# Altium PCB onion_dock.PcbDoc
Units mil, origin at the board's own origin, x right, y up, seen from the top; angles counter-clockwise.
Board outline 1720 x 1710 mil, 2 copper layers (Top Layer, Bottom Layer); 14 components, 37 nets, 125 pads, 7 vias.
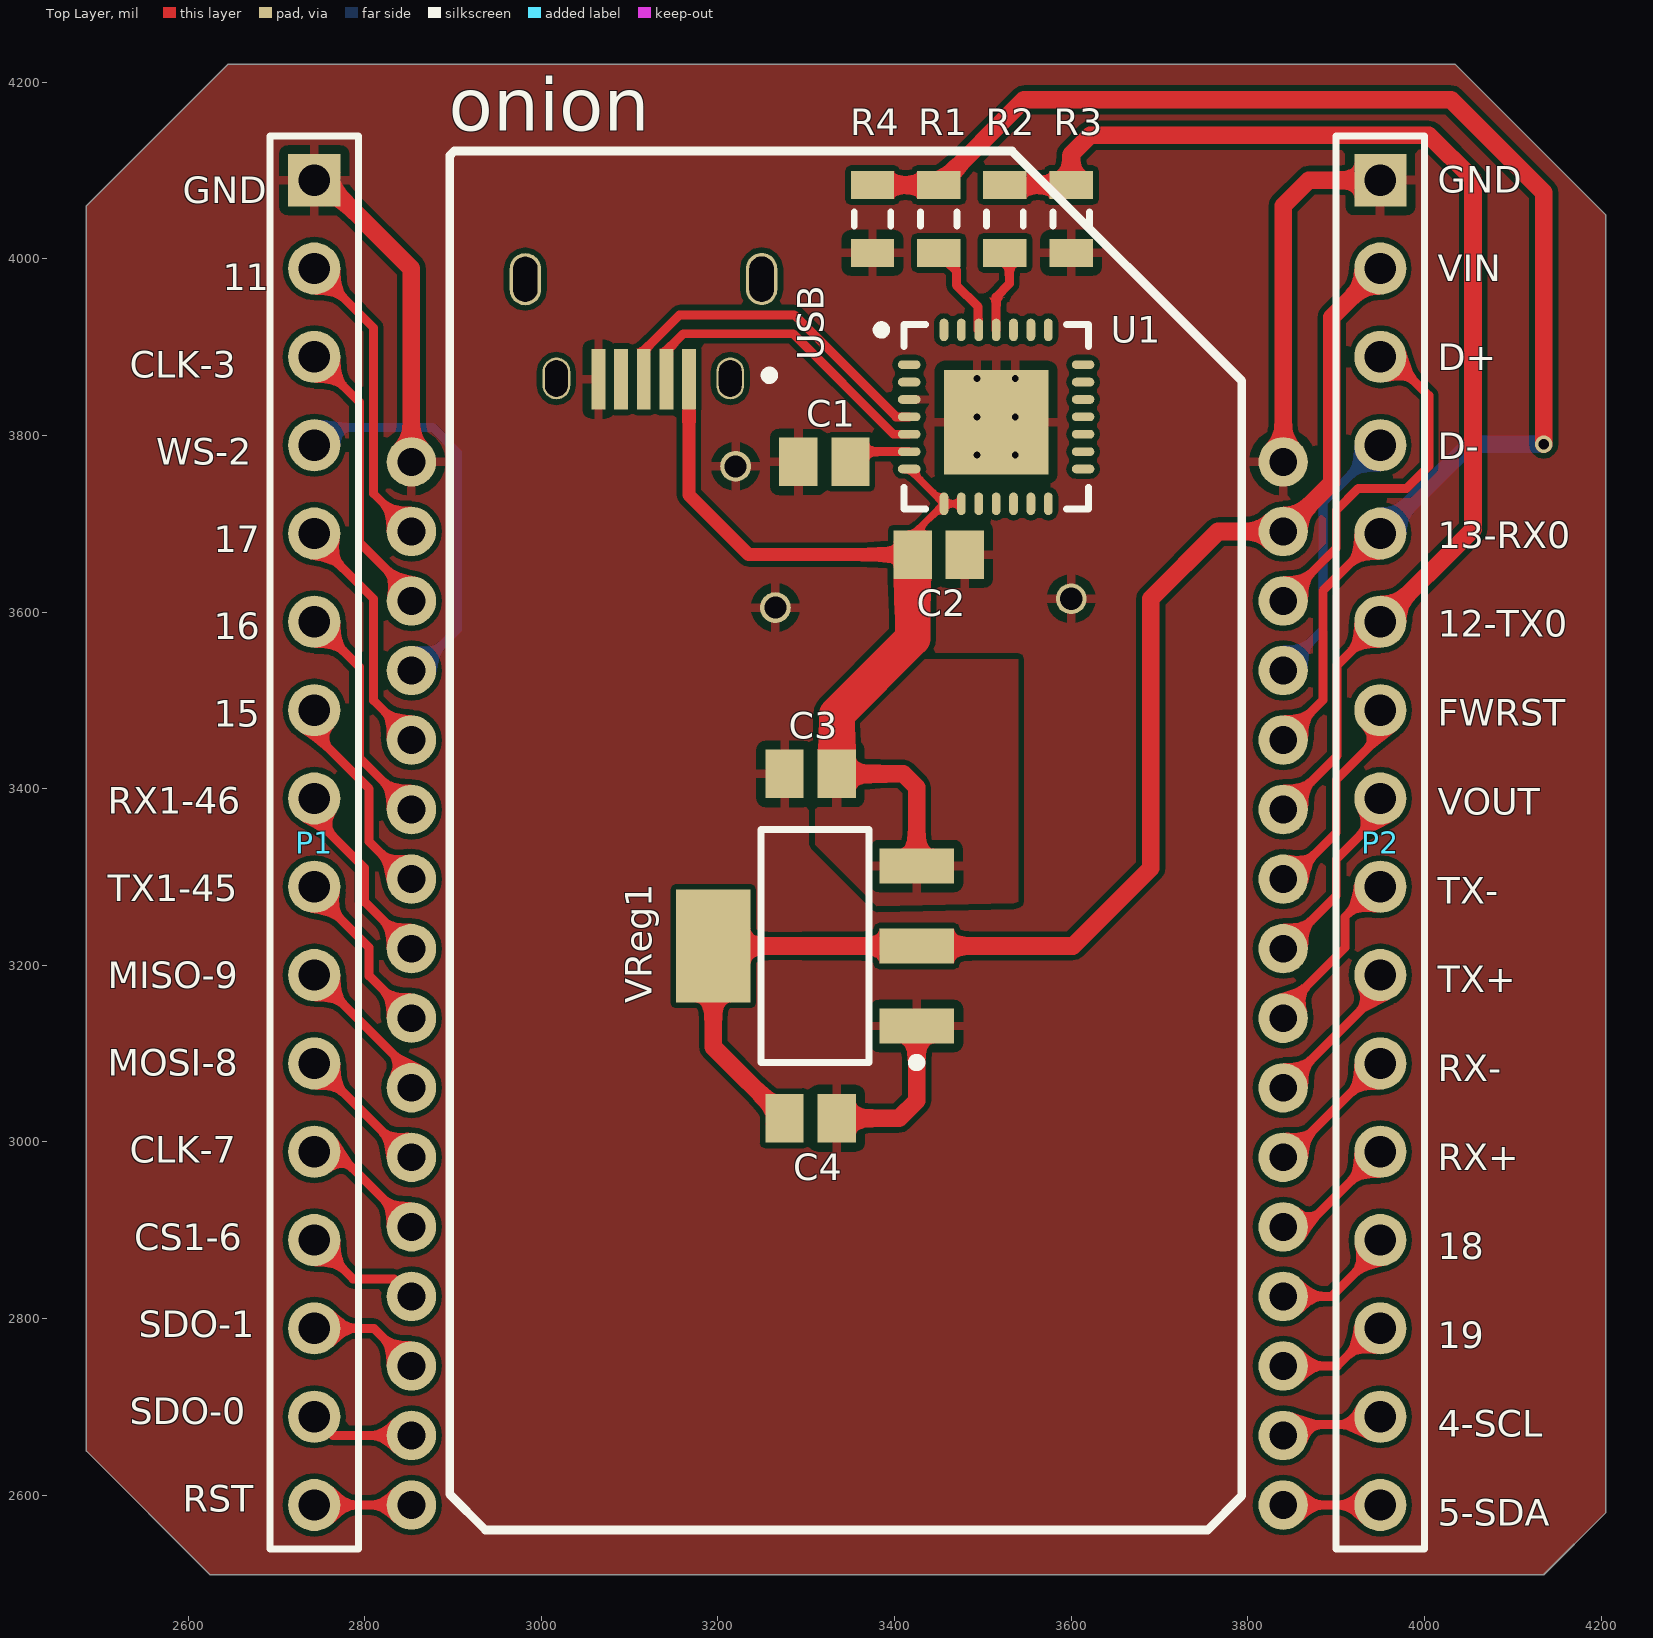
[diagram p0: Top Layer view]
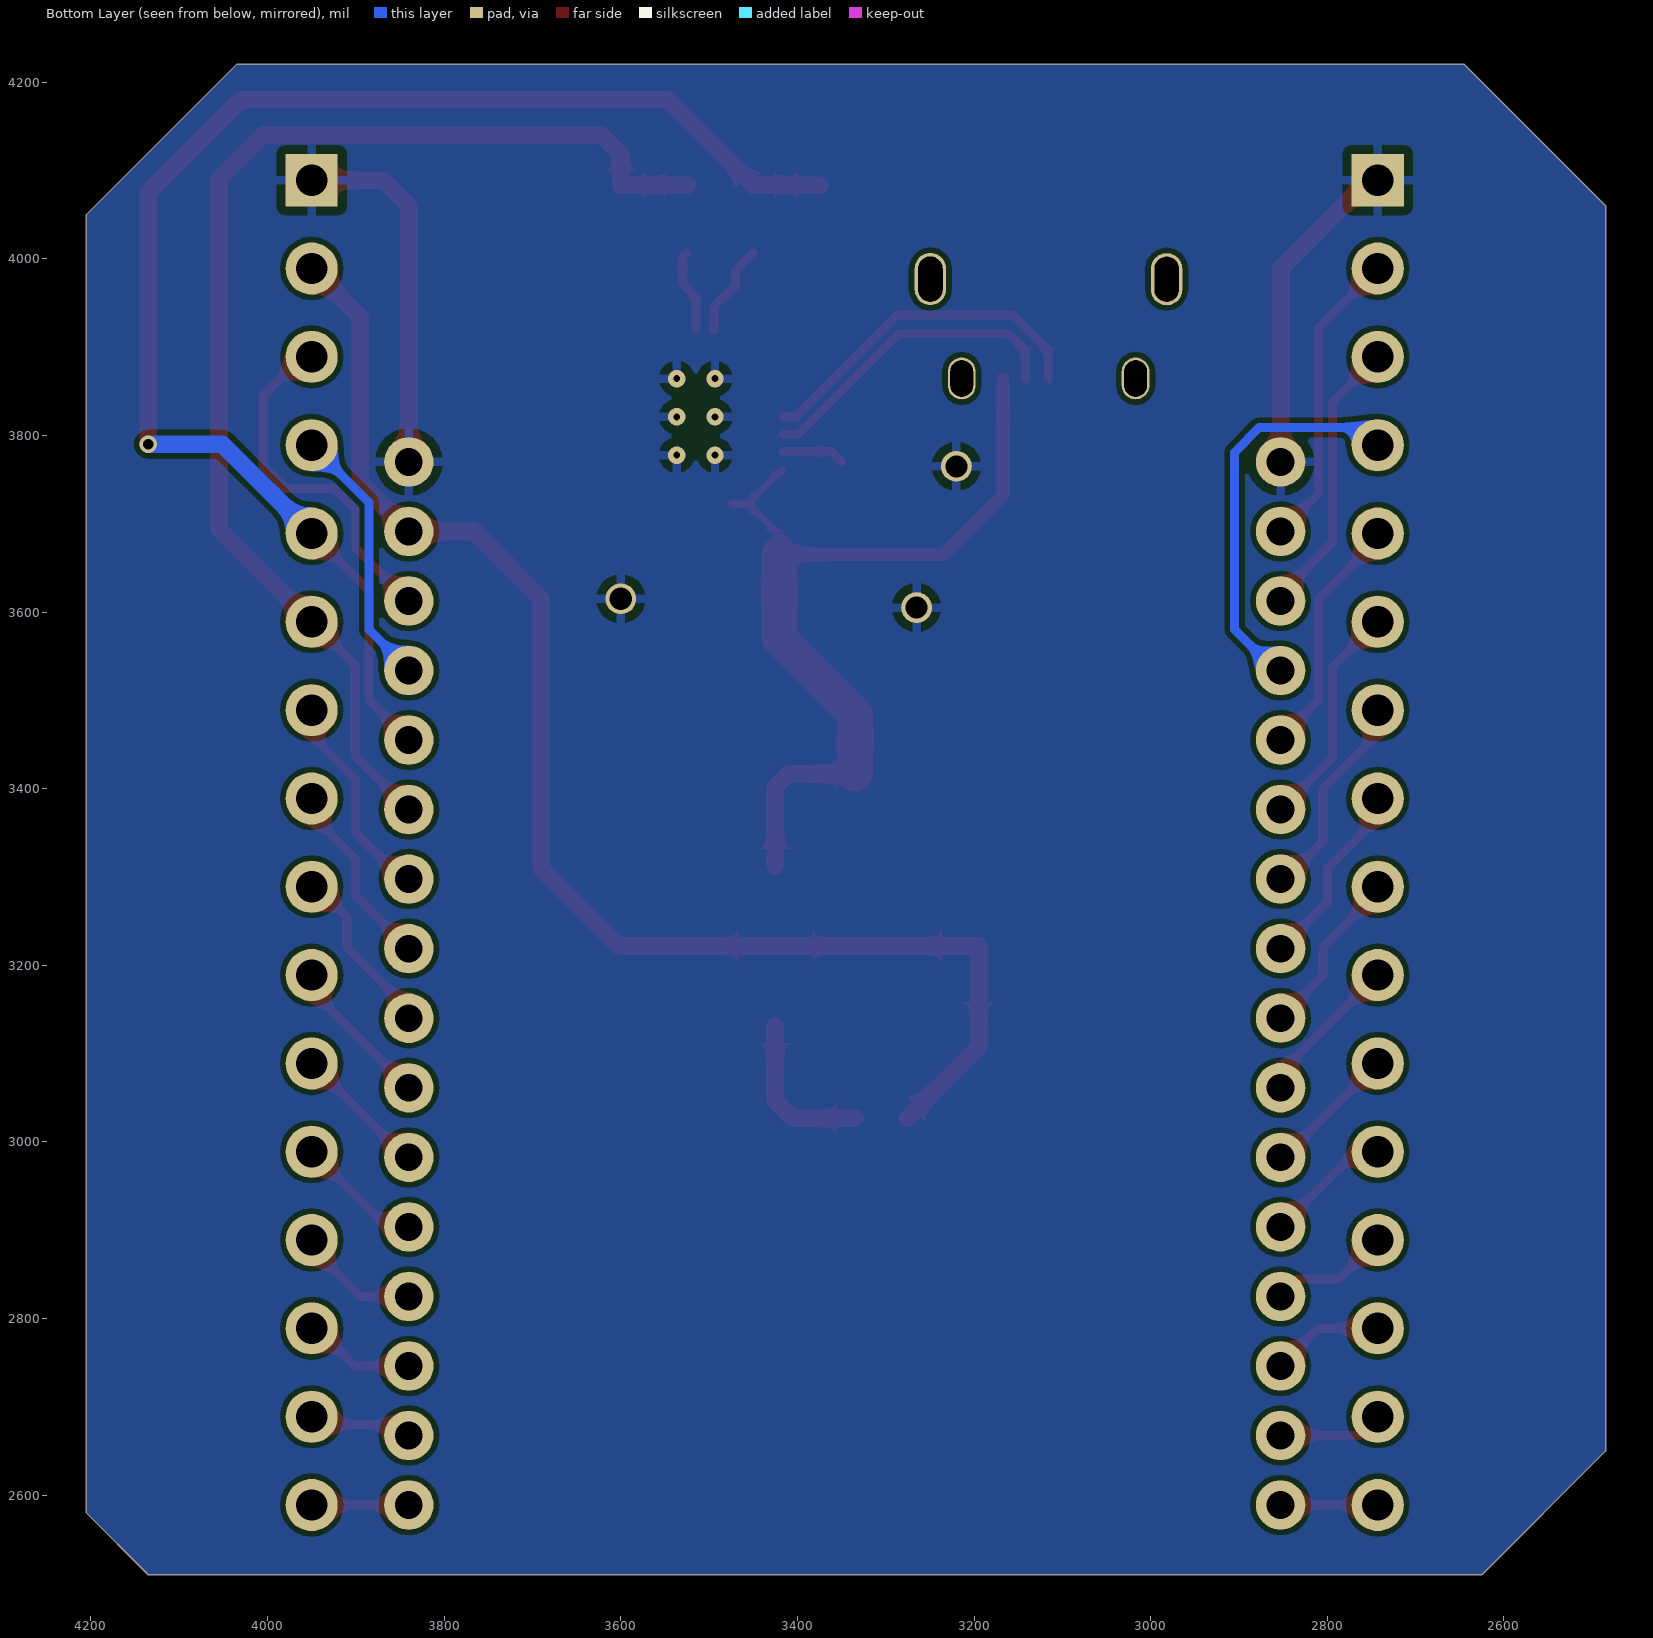
[diagram p1: Bottom Layer view, seen from below]
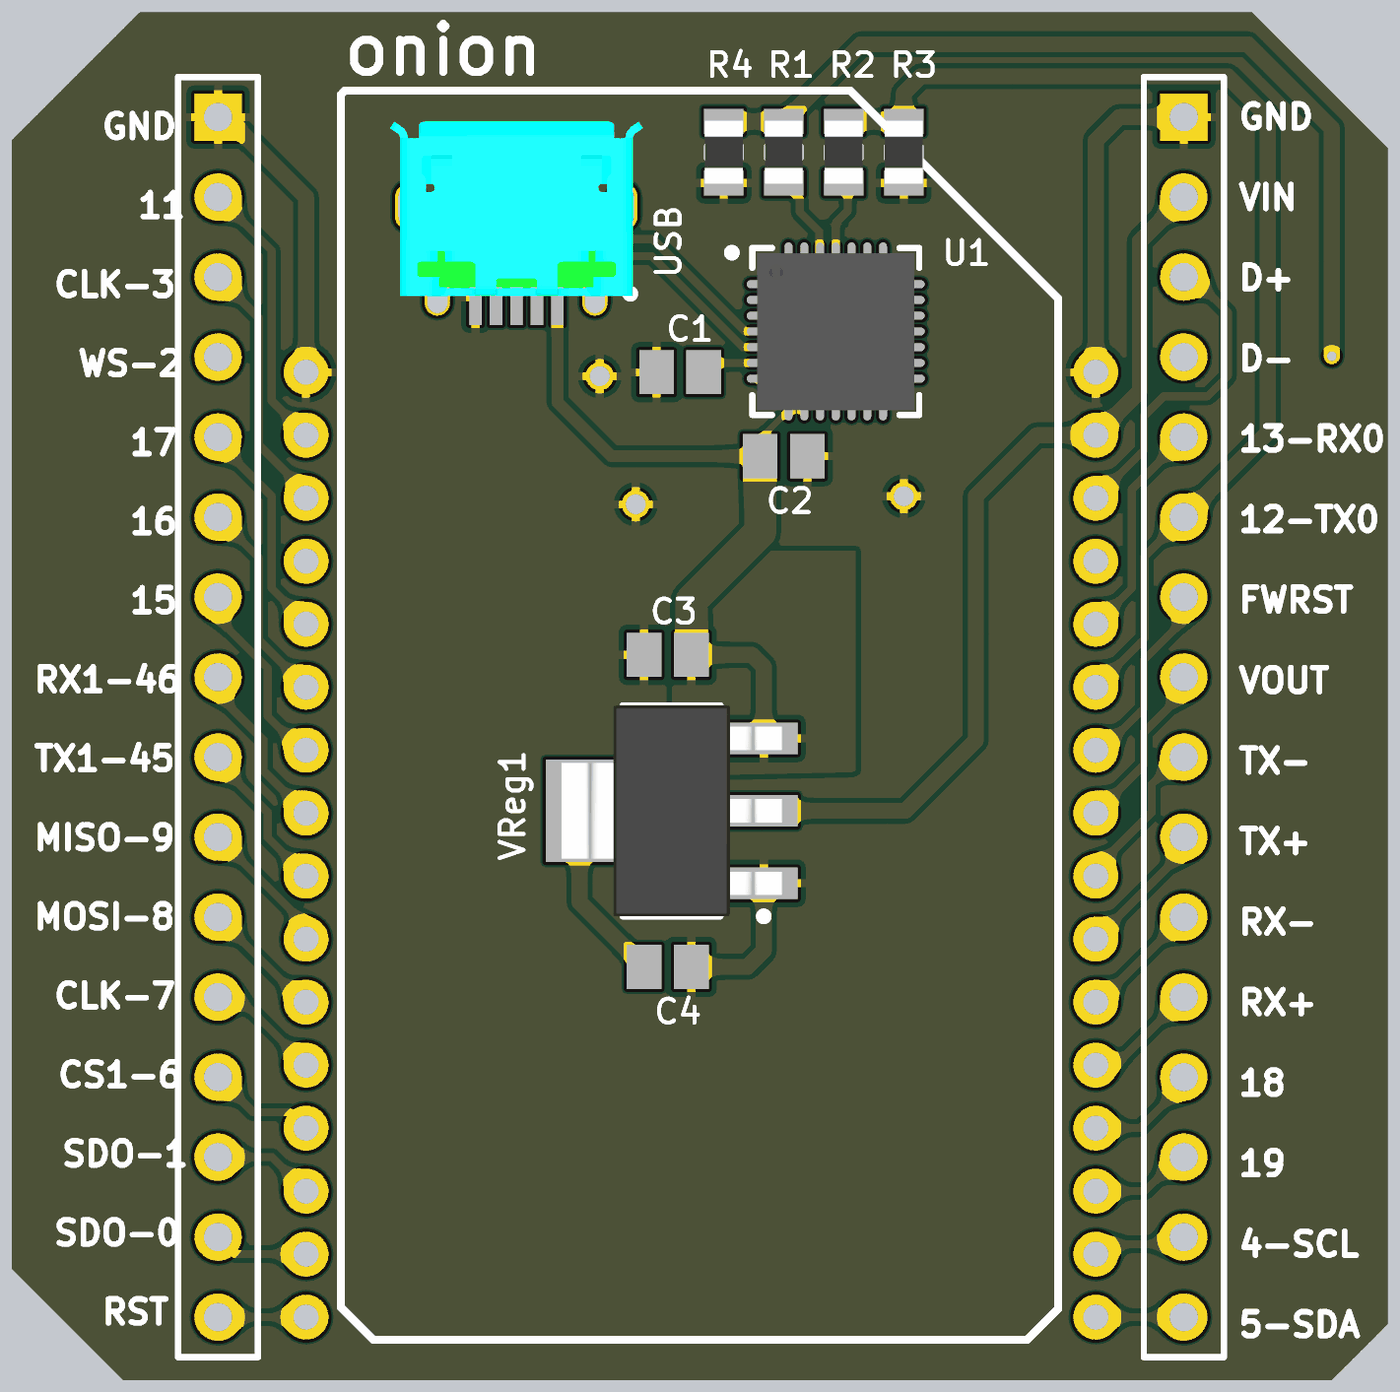
[diagram p2: 3D render of the assembled board from above, using the file's embedded part models]

## Layer stack, top to bottom
Top Solder: solder mask 0.4, Solder Resist, Dk 3.5
Top Layer: signal copper 1.4
Dielectric 1: dielectric 12.6, FR-4, Dk 4.8
Bottom Layer: signal copper 1.4
Bottom Solder: solder mask 0.4, Solder Resist, Dk 3.5

## Board outline
2625,2510 2485,2650 2485,4060 2645,4220 4035,4220 4205,4050 4205,2580 4135,2510

## Design rules (kind name [scope] priority, off if disabled: settings)
Clearance [All] p1: gap=6 ignorepadtopadclearanceinfootprint=FALSE
DiffPairsRouting [All] p1: maxlimit=10 minlimit=10 mostfreqgap=10 toplayer_minwidth=15 toplayer_maxwidth=15 toplayer_prefwidth=15 bottomlayer_minwidth=15 bottomlayer_maxwidth=15 bottomlayer_prefwidth=15 maxuncoupledlength=500
PolygonConnect [All] p1: connectstyle=Relief reliefconductorwidth=10 reliefentries=4 polygonreliefangle="90 Angle" airgapwidth=10
RoutingVias [All] p1: holewidth=12 width=20 viastyle="Through Hole" minholewidth=12 minwidth=20 maxholewidth=28 maxwidth=30
SolderMaskExpansion [All] p1: expansion=4
Width [All] p1: maxlimit=40 minlimit=8 preferedwidth=10 minimp=50.000000 maximp=50.000000 favimp=50.000000
29 further rules are at their usual default settings.

## Classes and differential pairs
differential pair UD: +UD_P -UD_N

## Components (designator, comment, footprint, x,y, rotation, side; value= is the part's Value field where it differs from the comment)
C1 "C0805_10uF_25V" C0805 3320.47,3770 r180 top value=10uF
C2 "C0805_10uF_25V" C0805 3450,3665 r0 top value=10uF
C3 "C0805_1uF_25V" C0805 3305,3416.78 r0 top value=1uF
C4 "C0805_1uF_25V" C0805 3305,3026.78 r180 top value=1uF
onion "ONION2" ONION2 3358.51,3112.5 r0 top locked
P1 "Header 16" HDR1X16 2742.94,4088.92 r270 top
P2 "Header 16" HDR1X16 3950,4088.92 r270 top
R1 "R0805_1K_100mW" R0805 3450,4045 r90 top value=1K
R2 "R0805_1K_100mW" R0805 3525,4045 r90 top value=1K
R3 "R0805_1K_100mW" R0805 3600,4045 r90 top value=3K
R4 "R0805_1K_100mW" R0805 3375,4045 r90 top value=3K
U1 "CP2102" QFN50P500X500X100_HS-29N 3515,3821 r0 top
USB "USB" MicroUSB 3075,3900 r270 top
VReg1 "3v3 Voltage Regulator" SOT230P700X180-4N 3309.84,3221.78 r180 top

## Footprints (in the part's own frame and the unit in brackets; to place one, negate y for a bottom-side part, rotate by r counter-clockwise, add the part's x,y. Pads: shape width x height; smd on the part's side, far side on the other; paste and mask are expansions set on the pad)
C0805 [mm] "Chip Capacitor, Body 2.0x1.3mm, IPC High Density"
  rect 1.1x1.4 smd: 1(-0.75,0) 2(0.75,0)
  body extent -1.1,-0.72 1.1,0.72, height 1.4
HDR1X16 [mm] "Connector; Header; 16 Position"
  rect 1.5x1.5 hole 0.9: 1(0,0)
  round 1.5 hole 0.9: 2(2.54,0) 3(5.08,0) 4(7.62,0) 5(10.16,0) 6(12.7,0) 7(15.24,0) 8(17.78,0) 9(20.32,0) 10(22.86,0) 11(25.4,0) 12(27.94,0) 13(30.48,0) 14(33.02,0) 15(35.56,0) 16(38.1,0)
  silkscreen extent -1.27,-1.27 39.37,1.27
MicroUSB [mm] "Connector; USB Mini-B, Sinking Type, SM; 5 Position; Right Angle"
  rect 1.75x0.4 smd: 1(0.925,2.341) 2(0.925,1.691) 3(0.925,1.041) 4(0.925,0.391) 5(0.925,-0.259)
  oval 1.5x0.9 hole 0.7 slot 1.3 at 0 deg: ""(-1.955,4.432) ""(-1.952,-2.364)
  oval 1.2x0.8 hole 0.65 slot 1.05 at 0 deg: ""(0.903,3.529) ""(0.903,-1.471)
  silkscreen extent 0.69,4.53 0.94,4.78, body extent -4.65,-2.98 0.93,5.07, height 2.42
ONION2 [mil]
  round 56 hole 31.5: 1(-505.58,657.52) 2(-505.58,578.78) 3(-505.58,500.04) 4(-505.58,421.3) 5(-505.58,342.56) 6(-505.58,263.82) 7(-505.58,185.08) 8(-505.58,106.34) 9(-505.58,27.6) 10(-505.58,-51.14) 11(-505.58,-129.88) 12(-505.58,-208.62) 13(-505.58,-287.36) 14(-505.58,-366.1) 15(-505.58,-444.84) 16(-505.58,-523.58) 17(481.49,-523.6) 18(481.49,-444.86) 19(481.49,-366.12) 20(481.49,-287.38) 21(481.49,-208.64) 22(481.49,-129.9) 23(481.49,-51.16) 24(481.49,27.58) 25(481.49,106.32) 26(481.49,185.06) 27(481.49,263.8) 28(481.49,342.54) 29(481.49,421.28) 30(481.49,500.02) 31(481.49,578.76) 32(481.49,657.5)
  silkscreen extent -462,-552 435,1010
QFN50P500X500X100_HS-29N [mm] "QFN, 28-Leads, Body 5.00x5.00mm, Pitch 0.50mm, Thermal Pad 4.00x3.13mm, IPC Medium Density"
  oval 0.65x0.25 smd: 1(-2.5,1.5) 2(-2.5,1) 3(-2.5,0.5) 4(-2.5,0) 5(-2.5,-0.5) 6(-2.5,-1) 7(-2.5,-1.5) 15(2.5,-1.5) 16(2.5,-1) 17(2.5,-0.5) 18(2.5,0) 19(2.5,0.5) 20(2.5,1) 21(2.5,1.5)
  oval 0.25x0.65 smd: 8(-1.5,-2.5) 9(-1,-2.5) 10(-0.5,-2.5) 11(0,-2.5) 12(0.5,-2.5) 13(1,-2.5) 14(1.5,-2.5) 22(1.5,2.5) 23(1,2.5) 24(0.5,2.5) 25(0,2.5) 26(-0.5,2.5) 27(-1,2.5) 28(-1.5,2.5)
  rect 3x3 smd: 29(0,-0.152)
  silkscreen extent -3.42,-2.65 2.65,2.65, body extent -2.5,-2.51 2.5,2.49, height 1
R0805 [mm] "Chip Resistor, 2-Leads, Body 2.00x1.20mm, IPC Medium Density"
  rect 0.8x1.25 smd: 1(-0.975,0) 2(0.975,0)
  silkscreen extent -0.2,-0.53 0.2,0.53, body extent -1,-0.6 1,0.6, height 0.45
SOT230P700X180-4N [mm] "SOT223, 4-Leads, Body 6.50x7.00mm (avg), Pitch 2.30mm, IPC Medium Density"
  rect 2.15x1 smd: 1(-2.925,2.3) 2(-2.925,0) 3(-2.925,-2.3)
  rect 2.15x3.25 smd: 4(2.925,0)
  silkscreen extent -3.05,-3.35 1.55,3.47, body extent -3.5,-3.35 3.5,3.35, height 1.8

## Part data
C1 C2: "SMD Multilayer Ceramic Capacitor, 10 µF, ± 10%, X5R, 25 V, 0805 [2012 Metric]", Supplier Part Number 1=2491176, Supplier 1=Farnell
C3 C4: "SMD Multilayer Ceramic Capacitor, 1 µF, ± 10%, X7R, 25 V, 0805 [2012 Metric]", Supplier Part Number 1=2332737, Supplier 1=Farnell
P1 P2: "Header, 16-Pin", LatestRevisionDate=17-Jul-2002, LatestRevisionNote="Re-released for DXP Platform.", Publisher="Altium Limited"
R1 R2: "RES, THICK FILM, 1K, 1%,100mW, 0805", Power=0.1W, Supplier Part Number 1=9332383, Supplier 1=Farnell
R3 R4: "RES, THICK FILM, 1K, 1%,100mW, 0805"
U1: Supplier Part Number 1=727-CY7C6563428LTXCT, Supplier 1=Mouser
VReg1: library part 1117LV33, Supplier Part Number 1=2455674, Supplier 1=Farnell
USB: Mouser=http://www.mouser.de/ProductDetail/TE-Connectivity-AMP/292303-1/?qs=sGAEpiMZZMulM8LPOQ%252byk2ChD%2fcRWFzQGYjPa0hd1DM%3d

## Free pads (board coordinates)
  round 35 hole 25: 2(3220,3765) 2(3265,3605) 2(3600,3615)

## Via types
v1: diameter 19.68, hole 7.87, Top Layer to Bottom Layer, 6 vias
v2: diameter 20, hole 12, Top Layer to Bottom Layer, 1 vias

## Nets (pads, with @x,y where several pads share a name; then routed paths per layer and width w, separated by ;. In a path a pad name is that pad's centre, name@x,y a point inside that pad or via, vN(x,y) a via of type N, cw(c..) or ccw(c..) an arc to the next point about the centre after c; other vN are vias at no path point)
GND: C1.2 C2.2 C3.1 C4.1 onion.1 onion.32 P1.1 P2.1 pad.2 R3.1 R4.1 U1.3 U1.29 USB.5 VReg1.1 | length 955.5
  Top Layer w20: P1.1@2752.94,4088.92 2852.94,3988.92 onion.1 ; C4.1 3405,3026.78 3425,3046.78 VReg1.1 ; onion.32 3840,4060 3868.92,4088.92 P2.1
  other v1: 3493.35,3777.69 3536.65,3777.69 3493.35,3821 3536.65,3821 3493.35,3864.31 3536.65,3864.31
NET_POW: onion.25 P2.8 | length 215.7
  Top Layer w10: onion.25 3900,3278.82 3900,3320 3950,3370 P2.8
NetC1_1: C1.1 U1.6 | length 71.4
  Top Layer w10: C1.1 3361.63,3781.63 U1.6
Netonion_2: onion.2 P1.2 | length 343.2
  Top Layer w10: P1.2 2810,3921.85 2810,3734.21 onion.2
Netonion_3: onion.3 P1.3 | length 321.9
  Top Layer w10: P1.3 2794,3837.85 2794,3679 2852.94,3620.06 onion.3
Netonion_4: onion.4 P1.4 | length 478.7
  Bottom Layer w10: P1.4 2763.04,3809.02 2876.98,3809.02 2905,3780.99 2905,3580 2852.94,3527.94 onion.4 onion.4@2852.94,3550
Netonion_5: onion.5 P1.5 | length 279.4
  Top Layer w10: P1.5 2742.94,3682.06 2810,3615 2810,3500 2852.94,3457.06 onion.5
Netonion_6: onion.6 P1.6 | length 258.2
  Top Layer w10: P1.6 2794,3537.85 2794,3435.25 onion.6
Netonion_7: onion.7 P1.7 | length 240.1
  Top Layer w10: P1.7 2742.94,3462.06 2805,3400 2805,3340 2847.42,3297.58 onion.7
Netonion_8: onion.8 P1.8 | length 215.6
  Top Layer w10: P1.8 2742.94,3367.06 2800,3310 2800,3271.77 onion.8
Netonion_9: onion.9 P1.9 | length 194.4
  Top Layer w10: P1.9 2742.94,3282.06 2805,3220 2805,3188.03 onion.9
Netonion_10: onion.10 P1.10 | length 173.1
  Top Layer w10: P1.10 2852.94,3078.92 onion.10
Netonion_11: onion.11 P1.11 | length 154
  Top Layer w10: P1.11 2849.24,2982.62 onion.11
Netonion_12: onion.12 P1.12 | length 145.2
  Top Layer w10: P1.12 2767.9,2988.92 onion.12
Netonion_13: onion.13 P1.13 | length 136.4
  Top Layer w10: P1.13 2786.85,2845 2833.07,2845 onion.13
Netonion_14: onion.14 P1.14 | length 127.6
  Top Layer w10: P1.14 2810.42,2788.92 onion.14
Netonion_15: onion.15 P1.15 | length 118.8
  Top Layer w10: P1.15 2764.2,2667.66 onion.15
Netonion_16: onion.16 P1.16 | length 110
  Top Layer w10: P1.16 onion.16
Netonion_17: onion.17 P2.16 | length 110
  Top Layer w10: onion.17 P2.16
Netonion_18: onion.18 P2.15 | length 118.8
  Top Layer w10: onion.18 3852.36,2680 3941.08,2680 P2.15
Netonion_19: onion.19 P2.14 | length 127.6
  Top Layer w10: onion.19 3901.38,2746.38 3943.92,2788.92 P2.14
Netonion_20: onion.20 P2.13 | length 141.6
  Top Layer w10: onion.20 3895.12,2825.12 3950,2880 P2.13
Netonion_21: onion.21 P2.12 | length 145.2
  Top Layer w10: onion.21 3864.94,2903.86 P2.12
Netonion_22: onion.22 P2.11 | length 154
  Top Layer w10: onion.22 3843.68,2982.6 P2.11
Netonion_23: onion.23 P2.10 | length 173.1
  Top Layer w10: onion.23 3950,3171.34 P2.10
Netonion_24: onion.24 P2.9 | length 198
  Top Layer w10: onion.24 3840,3150 3910,3220 3910,3255 3943.92,3288.92 P2.9
PC_RXD: R2.1 U1.25 | length 95.5
  Top Layer w10: U1.25 3515,3956.61 3530,3971.61 3530,4001.61 R2.1
PC_TXD: R1.1 U1.26 | length 118.3
  Top Layer w10: R1.1 3470,3986.61 3470,3970 3494.52,3945.48 3494.52,3919.43 U1.26 U1.26@3495.32,3931.3
RESET_BTN: onion.26 P2.7 | length 241.3
  Top Layer w10: onion.26 3847.56,3297.56 3900,3350 3900,3410 3950,3460 P2.7
RXD: onion.28 P2.5 R1.2 R4.2 | length 1634.8
  Top Layer w10: onion.28 3885,3500.04 3885,3623.92 P2.5
  Top Layer w20: R4.2 R1.2 3546.61,4180 4030,4180 4135,4075 v2(4135,3790)
  Bottom Layer w20: P2.5 4051.08,3790 v2(4135,3790)
TXD: onion.27 P2.6 R2.2 R3.2 | length 1397.4
  Top Layer w10: onion.27 3901,3437.3 3901,3539.92 P2.6
  Top Layer w20: R2.2 R3.2 3600,4118.39 3621.61,4140 4005,4140 4055,4090 4055,3693.92 P2.6
UD_N: U1.5 USB.2 | length 362.3
  Top Layer w10: USB.2 3141.59,3895.86 3160.74,3915 3285.09,3915 3398.78,3801.32 U1.5
UD_P: U1.4 USB.3 | length 397.5
  Top Layer w10: USB.3 3116,3895.86 3156.58,3936.43 3286.29,3936.43 3401.72,3821 U1.4
USB+: onion.30 P2.3 | length 406.2
  Top Layer w10: onion.30 3900,3672.52 3900,3715 3925,3740 3980,3740 4005,3765 4005,3845 3961.08,3888.92 P2.3
USB-: onion.29 P2.4 | length 306.9
  Top Layer w10: onion.29 onion.29@3840,3540
  Bottom Layer w10: onion.29 3840,3535 3885,3580 3885,3723.92 P2.4
VCC_3V3: C4.2 onion.31 P2.2 VReg1.2 VReg1.4 | length 1590.1
  Top Layer w20: C4.2 3194.68,3107.57 VReg1.4 VReg1.2 3601.78,3221.78 3690,3310 3690,3615 3766.26,3691.26 onion.31 3895,3746.26 3895,3933.92 P2.2
VCC_5V: C2.1 C3.2 U1.7 U1.8 U1.9 USB.1 VReg1.3 | length 1029.7
  Top Layer w8: U1.7 U1.8 ; C2.1 3420.47,3687.1 U1.8 ; U1.9 U1.8
  Top Layer w15: USB.1 3167.18,3732.82 3235,3665 C2.1
  Top Layer w20: C3.2 3410,3416.78 3425,3401.78 VReg1.3
  Top Layer w40: C3.2 3334.53,3484.05 3420.47,3570 C2.1
pads on no net: U1.1 U1.2 U1.10 U1.11 U1.12 U1.13 U1.14 U1.15 U1.16 U1.17 U1.18 U1.19 U1.20 U1.21 U1.22 U1.23 U1.24 U1.27 U1.28 USB. USB.4

## Polygon pours and split planes (outlines as drawn)
GND on Bottom Layer "Top Layer-No Net2" (solid, pour order 13): 2625,2510 2485,2650 2485,4060 2645,4220 4035,4220 4205,4050 4205,2580 4135,2510
GND on Top Layer "Top Layer-No Net1" (solid, pour order 12): 2625,2510 2485,2650 2485,4060 2645,4220 4035,4220 4205,4050 4205,2580 4135,2510
VCC_5V on Top Layer "Top Layer-No Net" (solid, pour order 4): 3535,3270 3540,3271.78 3540,3546.78 3330,3546.78 3310,3526.78 3310,3336.78 3380,3266.78
GND on Top Layer "Top Layer-No Net" (solid, pour order 2): 3295,3356.78 3105,3356.78 3085,3336.78 3085,3036.78 3125,2996.78 3290,2996.78 3295,3001.78

## Silkscreen, mask and mechanical layers (free items; w line width, h text height)
Top Overlay:
  text "GND" at 4015,4075 h30
  text "GND" at 2594.25,4063.02 h30
  text "VIN" at 4015,3974.36 h30
  text "11" at 2639.24,3964.24 h30
  text "D+" at 4015,3873.72 h30
  text "CLK-3" at 2534.27,3865.46 h30
  text "D-" at 4015,3773.08 h30
  text "WS-2" at 2564.26,3766.68 h30
  text "13-RX0" at 4015,3672.44 h30
  text "17" at 2629.24,3667.9 h30
  text "12-TX0" at 4015,3571.8 h30
  text "16" at 2629.24,3569.12 h30
  text "FWRST" at 4015,3471.16 h30
  text "15" at 2629.24,3470.34 h30
  text "RX1-46" at 2509.28,3371.56 h30
  text "VOUT" at 4015,3370.52 h30
  text "TX1-45" at 2509.28,3272.78 h30
  text "TX-" at 4015,3269.89 h30
  text "MISO-9" at 2509.28,3174 h30
  text "TX+" at 4015,3169.25 h30
  text "MOSI-8" at 2509.28,3075.22 h30
  text "RX-" at 4015,3068.61 h30
  text "CLK-7" at 2534.27,2976.44 h30
  text "RX+" at 4015,2967.97 h30
  text "CS1-6" at 2539.27,2877.66 h30
  text "18" at 4015,2867.33 h30
  text "SDO-1" at 2544.27,2778.88 h30
  text "19" at 4015,2766.69 h30
  text "SDO-0" at 2534.27,2680.1 h30
  text "4-SCL" at 4015,2666.05 h30
  text "RST" at 2594.25,2581.32 h30
  text "5-SDA" at 4015,2565.41 h30
Mechanical 1:
  lines w10: 2485,2650 2485,4010 2485,4060 2645,4220 3520,4220 4035,4220 4205,4050 4205,2580 4135,2510 2625,2510 2485,2650